# Altium PCB ControlBoard.PcbDoc
Units mm, origin at the board's own origin, x right, y up, seen from the top; angles counter-clockwise.
Board outline 70.61 x 45.09 mm, 2 copper layers (Top Layer, Bottom Layer); 70 components, 40 nets, 252 pads, 100 vias.
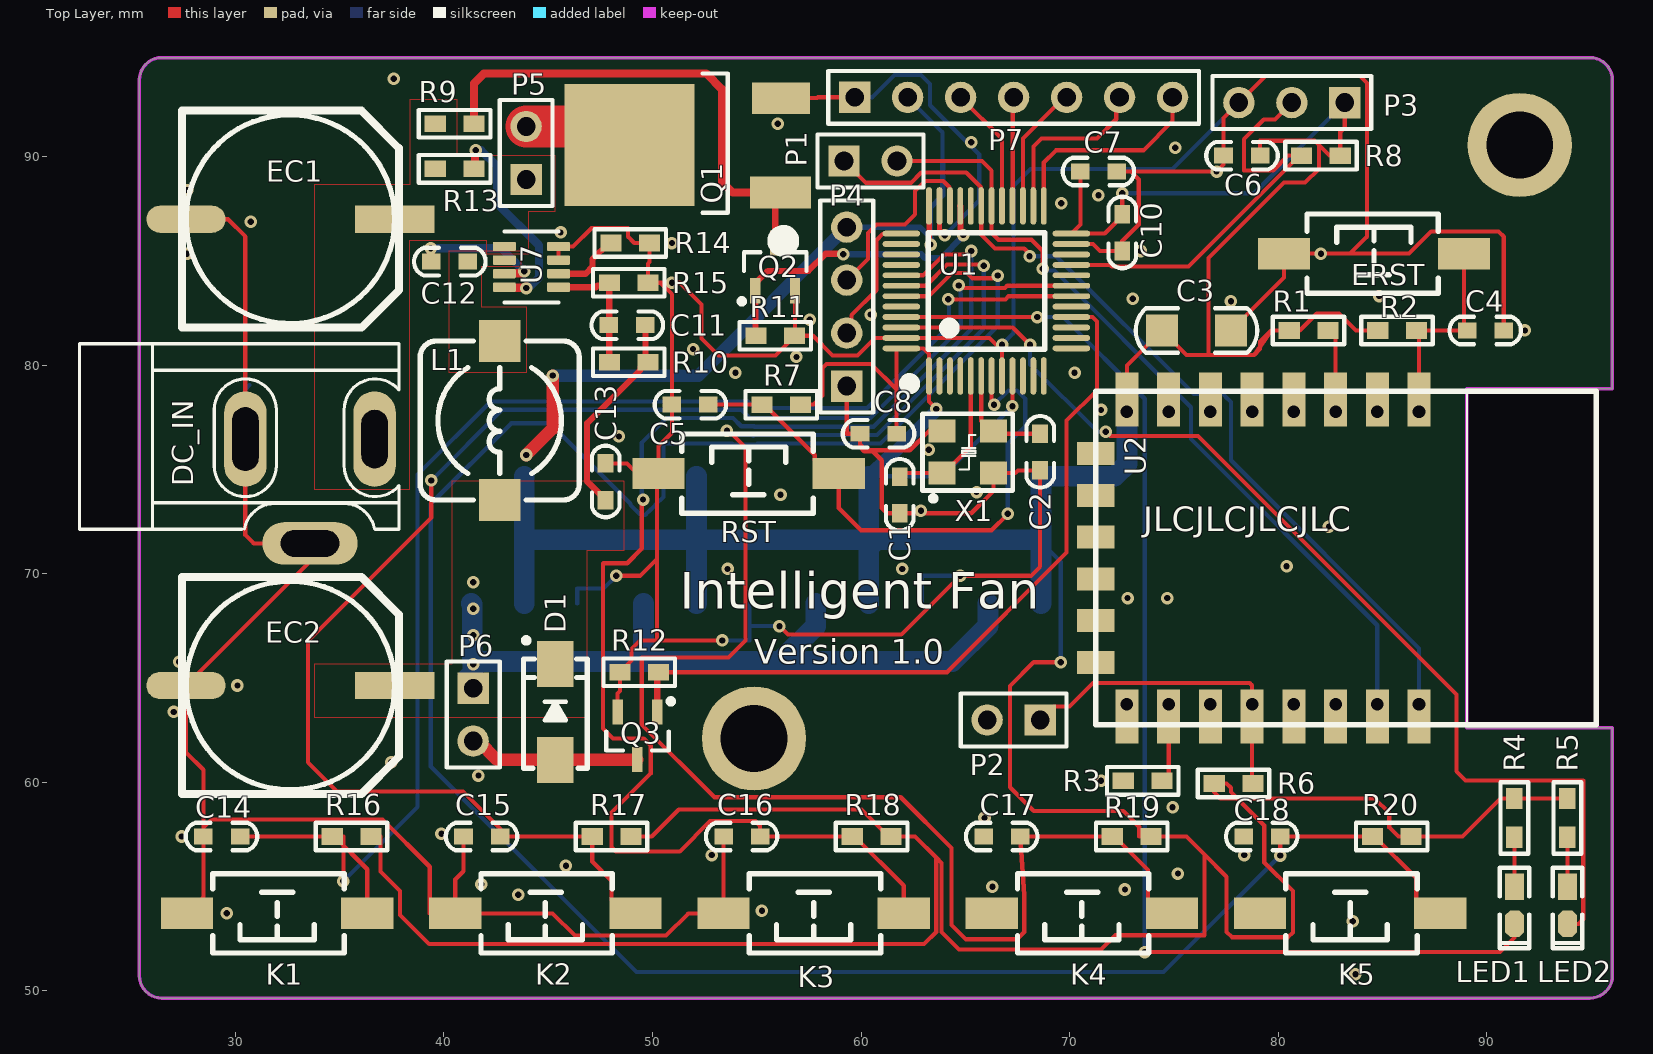
[diagram p0: Top Layer view]
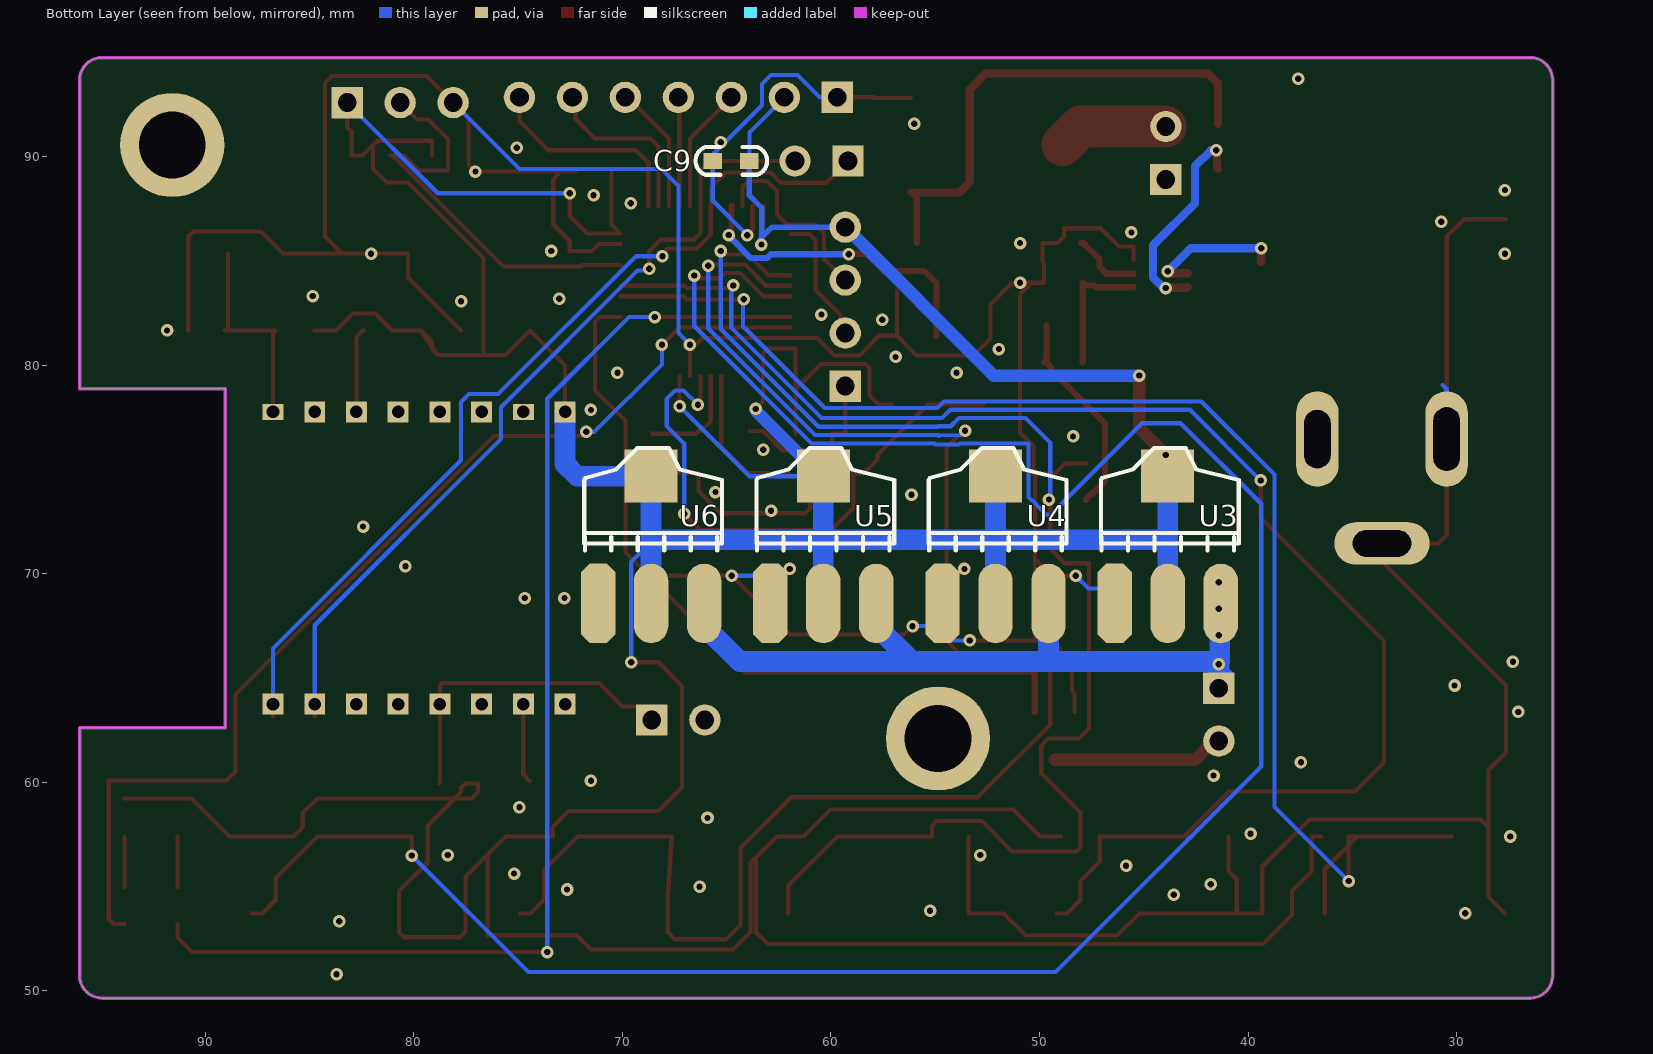
[diagram p1: Bottom Layer view, seen from below]

## Layer stack, top to bottom
Top Solder: solder mask 0.0102, Solder Resist, Dk 3.5
Top Layer: signal copper 0.0356
Dielectric 1: dielectric 0.32, FR-4, Dk 4.8
Bottom Layer: signal copper 0.0356
Bottom Solder: solder mask 0.0102, Solder Resist, Dk 3.5

## Board outline
25.4,50.732 25.4,93.667 cw(c26.475,93.667) 26.475,94.742 94.937,94.742 cw(c94.937,93.667) 96.012,93.667 96.012,78.867 89.027,78.867 89.027,62.611 96.012,62.611 96.012,50.732 cw(c94.937,50.732) 94.937,49.657 26.475,49.657 cw(c26.475,50.732)

## Design rules (kind name [scope] priority, off if disabled: settings)
AssemblyTestPointUsage [All] p0: scope1count=1 scope1_0_kind=Board scope1_0_value=Board scope2count=1 scope2_0_kind=Board scope2_0_value=Board commentlength=0
AssemblyTestpoint [All] p0: scope1count=1 scope1_0_kind=Board scope1_0_value=Board scope2count=1 scope2_0_kind=Board scope2_0_value=Board commentlength=0
Clearance [All] p0: scope1count=1 scope1_0_kind=Board scope1_0_value=Board scope2count=1 scope2_0_kind=Board scope2_0_value=Board commentlength=0 gap=0.2
Clearance [All] p1: gap=0.2 ignorepadtopadclearanceinfootprint=FALSE
ComponentClearance [All] p0: scope1count=1 scope1_0_kind=Board scope1_0_value=Board scope2count=1 scope2_0_kind=Board scope2_0_value=Board commentlength=0 gap=0.254 collisioncheckmode=3
DiffPairsRouting [All] p0: scope1count=1 scope1_0_kind=Board scope1_0_value=Board scope2count=1 scope2_0_kind=Board scope2_0_value=Board commentlength=0
FabricationTestPointUsage [All] p0: scope1count=1 scope1_0_kind=Board scope1_0_value=Board scope2count=1 scope2_0_kind=Board scope2_0_value=Board commentlength=0 valid=0 allowmultiple=FALSE
FabricationTestpoint [All] p0: scope1count=1 scope1_0_kind=Board scope1_0_value=Board scope2count=1 scope2_0_kind=Board scope2_0_value=Board commentlength=0 side=3 testpointundercomponent=TRUE minsize=1.016 maxsize=2.54 preferedsize=1.524 minholesize=0 maxholesize=1.016 preferedholesize=0.813 testpointgrid=0.025
FanoutControl Fanout_BGA [All] p0 off: scope1count=1 scope1_0_kind=Board scope1_0_value=Board scope2count=1 scope2_0_kind=Board scope2_0_value=Board commentlength=69 // Protel DXP Scope 1 Expression Was: IsBGA   Fanout_BGA (Default Rule)
FanoutControl Fanout_LCC [All] p0 off: scope1count=1 scope1_0_kind=Board scope1_0_value=Board scope2count=1 scope2_0_kind=Board scope2_0_value=Board commentlength=69 // Protel DXP Scope 1 Expression Was: IsLCC   Fanout_LCC (Default Rule)
FanoutControl Fanout_SOIC [All] p0 off: scope1count=1 scope1_0_kind=Board scope1_0_value=Board scope2count=1 scope2_0_kind=Board scope2_0_value=Board commentlength=71 // Protel DXP Scope 1 Expression Was: IsSOIC   Fanout_SOIC (Default Rule)
FanoutControl Fanout_Small [All] p0 off: scope1count=1 scope1_0_kind=Board scope1_0_value=Board scope2count=1 scope2_0_kind=Board scope2_0_value=Board commentlength=84 // Protel DXP Scope 1 Expression Was: (CompPinCount < 5)   Fanout_Small (Default Rule)
FanoutControl Fanout_Default [All] p0: scope1count=1 scope1_0_kind=Board scope1_0_value=Board scope2count=1 scope2_0_kind=Board scope2_0_value=Board commentlength=30 // Fanout_Default (Default Rule)
Height [All] p0: scope1count=1 scope1_0_kind=Board scope1_0_value=Board scope2count=1 scope2_0_kind=Board scope2_0_value=Board commentlength=0
HoleSize [All] p0: scope1count=1 scope1_0_kind=Board scope1_0_value=Board scope2count=1 scope2_0_kind=Board scope2_0_value=Board commentlength=0 absolutevalues=TRUE maxlimit=20 minlimit=0.025 maxpercent=80.000 minpercent=20.000
HoleSize [All] p1: absolutevalues=TRUE maxlimit=20 minlimit=0.025 maxpercent=80.000 minpercent=20.000
HoleToHoleClearance [All] p0: scope1count=1 scope1_0_kind=Board scope1_0_value=Board scope2count=1 scope2_0_kind=Board scope2_0_value=Board commentlength=0
LayerPairs [All] p0: scope1count=1 scope1_0_kind=Board scope1_0_value=Board scope2count=1 scope2_0_kind=Board scope2_0_value=Board commentlength=0 enforce=TRUE
MinimumSolderMaskSliver [All] p0: scope1count=1 scope1_0_kind=Board scope1_0_value=Board scope2count=1 scope2_0_kind=Board scope2_0_value=Board commentlength=0
NetAntennae [All] p0: scope1count=1 scope1_0_kind=Board scope1_0_value=Board scope2count=1 scope2_0_kind=Board scope2_0_value=Board commentlength=0
PasteMaskExpansion [All] p0: scope1count=1 scope1_0_kind=Board scope1_0_value=Board scope2count=1 scope2_0_kind=Board scope2_0_value=Board commentlength=0 expansion=0
PlaneClearance [All] p0: scope1count=1 scope1_0_kind=Board scope1_0_value=Board scope2count=1 scope2_0_kind=Board scope2_0_value=Board commentlength=0 clearance=0.508
PlaneConnect [All] p0: scope1count=1 scope1_0_kind=Board scope1_0_value=Board scope2count=1 scope2_0_kind=Board scope2_0_value=Board commentlength=0 planeconnectstyle=Direct reliefexpansion=0.508 reliefentries=4 reliefconductorwidth=0.254 reliefairgap=0.254
PlaneConnect [All] p1: planeconnectstyle=Direct reliefexpansion=0.508 reliefentries=4 reliefconductorwidth=0.254 reliefairgap=0.254
PolygonConnect [All] p0: scope1count=1 scope1_0_kind=Board scope1_0_value=Board scope2count=1 scope2_0_kind=Board scope2_0_value=Board commentlength=0 connectstyle=Direct reliefconductorwidth=0.254 reliefentries=4 polygonreliefangle="90 Angle"
PolygonConnect [All] p1: connectstyle=Direct reliefconductorwidth=0.254 reliefentries=4 polygonreliefangle="90 Angle" airgapwidth=0.254
RoutingCorners [All] p0: scope1count=1 scope1_0_kind=Board scope1_0_value=Board scope2count=1 scope2_0_kind=Board scope2_0_value=Board commentlength=0 cornerstyle=45-Degree minsetback=2.54 maxsetback=2.54
RoutingLayers [All] p0: scope1count=1 scope1_0_kind=Board scope1_0_value=Board scope2count=1 scope2_0_kind=Board scope2_0_value=Board commentlength=0 top layer=Automatic bottom layer=Automatic
RoutingPriority [All] p0: scope1count=1 scope1_0_kind=Board scope1_0_value=Board scope2count=1 scope2_0_kind=Board scope2_0_value=Board commentlength=0
RoutingTopology [All] p0: scope1count=1 scope1_0_kind=Board scope1_0_value=Board scope2count=1 scope2_0_kind=Board scope2_0_value=Board commentlength=0 topology=Shortest
RoutingVias [All] p0: scope1count=1 scope1_0_kind=Board scope1_0_value=Board scope2count=1 scope2_0_kind=Board scope2_0_value=Board commentlength=0 holewidth=0.3 width=0.6 viastyle="Through Hole" minholewidth=0.3 minwidth=0.6 maxholewidth=0.711 maxwidth=1.27
RoutingVias [All] p1: holewidth=0.3 width=0.6 viastyle="Through Hole" minholewidth=0.3 minwidth=0.6 maxholewidth=0.711 maxwidth=1.27
ShortCircuit [All] p0: scope1count=1 scope1_0_kind=Board scope1_0_value=Board scope2count=1 scope2_0_kind=Board scope2_0_value=Board commentlength=0 allowed=FALSE
SilkToBoardRegionClearance [All] p0: scope1count=1 scope1_0_kind=Board scope1_0_value=Board scope2count=1 scope2_0_kind=Board scope2_0_value=Board commentlength=0
SilkToSilkClearance [All] p0: scope1count=1 scope1_0_kind=Board scope1_0_value=Board scope2count=1 scope2_0_kind=Board scope2_0_value=Board commentlength=0
SilkToSolderMaskClearance [All] p0 off: scope1count=1 scope1_0_kind=Board scope1_0_value=Board scope2count=1 scope2_0_kind=Board scope2_0_value=Board commentlength=44 // Protel DXP Scope 1 Expression Was: IsPad
SolderMaskExpansion [All] p0: scope1count=1 scope1_0_kind=Board scope1_0_value=Board scope2count=1 scope2_0_kind=Board scope2_0_value=Board commentlength=0 expansion=0.102
SolderMaskExpansion [All] p1: expansion=0.102 istentingtop=FALSE
UnRoutedNet [All] p0: scope1count=1 scope1_0_kind=Board scope1_0_value=Board scope2count=1 scope2_0_kind=Board scope2_0_value=Board commentlength=0
UnpouredPolygon [All] p0: scope1count=1 scope1_0_kind=Board scope1_0_value=Board scope2count=1 scope2_0_kind=Board scope2_0_value=Board commentlength=0
Width [All] p0: scope1count=1 scope1_0_kind=Board scope1_0_value=Board scope2count=1 scope2_0_kind=Board scope2_0_value=Board commentlength=0 maxlimit=20 minlimit=0.2 preferedwidth=0.2
Width [All] p1: maxlimit=20 minlimit=0.2 preferedwidth=0.2
28 further rules are at their usual default settings.

## Components (designator, comment, footprint, x,y, rotation, side; value= is the part's Value field where it differs from the comment)
C1 "C" "C 0603" 61.849,73.787 r90 top
C2 "C" "C 0603" 68.58,75.844 r90 top
C3 "C" "C 1206" 76.073,81.661 r180 top
C4 "C" "C 0603" 89.916,81.661 r180 top
C5 "C" "C 0603" 51.816,78.105 r0 top
C6 "C" "C 0603" 78.257,90.043 r0 top
C7 "C" "C 0603" 71.374,89.281 r180 top
C8 "C" "C 0603" 60.833,76.708 r0 top
C9 "" "C 0603" 64.77,89.789 r180 bottom
C10 "C" "C 0603" 72.517,86.36 r90 top
C11 "C" "C 0603" 48.793,81.915 r0 top
C12 "C" "C 0603" 40.284,84.963 r0 top
C13 "C" "C 0603" 47.752,74.422 r90 top
C14 "C" "C 0603" 29.337,57.406 r180 top locked
C15 "C" "C 0603" 41.803,57.406 r180 top locked
C16 "C" "C 0603" 54.268,57.406 r180 top locked
C17 "C" "C 0603" 66.734,57.406 r180 top locked
C18 "C" "C 0603" 79.199,57.406 r180 top locked
D1 "M7" SMA 45.339,63.373 r90 top locked
DC_IN "POWER" DC10B 26.035,72.136 r0 top locked
EC1 "C-CM" "CM F(10*10.2)" 32.639,86.995 r0 top
EC2 "C-CM" "CM F(10*10.2)" 32.639,64.643 r0 top
ERST "3x6x5" "TSW SMD-3*6*4.3" 84.582,85.344 r0 top
K1 "3x6x5" "TSW SMD-3*6*4.3" 32.004,53.721 r180 top locked
K2 "3x6x5" "TSW SMD-3*6*4.3" 44.863,53.721 r180 top locked
K3 "3x6x5" "TSW SMD-3*6*4.3" 57.721,53.721 r180 top locked
K4 "3x6x5" "TSW SMD-3*6*4.3" 70.58,53.721 r180 top locked
K5 "3x6x5" "TSW SMD-3*6*4.3" 83.439,53.721 r180 top locked
L1 "2A" CDRH74 42.672,77.343 r90 top
LED1 "红色" "LED 0603B" 91.313,54.102 r270 top
LED2 "红色" "LED 0603B" 93.853,54.102 r270 top
P1 "Header 2" HDR1X2 59.182,89.789 r0 top
P2 "Header 2" HDR1X2 68.58,62.992 r180 top
P3 "Header 3" HDR1X3 83.185,92.583 r180 top
P4 "Header 4" HDR1X4 59.309,78.994 r90 top
P5 "Header 2" HDR1X2 43.942,88.9 r90 top
P6 "Header 2" HDR1X2 41.402,64.516 r270 top locked
P7 "HDR-1X7" HDR1X7 59.69,92.837 r0 top
Q1 "IRFR3607" TO252 53.095,90.551 r90 top
Q2 "SI2302" SOT23-3N 55.88,84.709 r0 top
Q3 "SI2302" SOT23-3N 49.276,62.23 r180 top locked
R1 "1K" "R 0603" 81.445,81.661 r180 top
R2 "10K" "R 0603" 85.687,81.661 r0 top
R3 "1K" "R 0603" 73.495,60.071 r0 top
R4 "1K" "R 0603" 91.313,58.293 r270 top
R5 "1K" "R 0603" 93.853,58.293 r270 top
R6 "10K" "R 0603" 77.851,59.944 r0 top
R7 "10K" "R 0603" 56.172,78.105 r180 top
R8 "10K" "R 0603" 82.042,90.043 r180 top
R9 "2.1K" "R 0603" 40.513,91.567 r0 top
R10 "100K" "R 0603" 48.857,80.137 r0 top
R11 "10K" "R 0603" 55.88,81.407 r0 top
R12 "10K" "R 0603" 49.365,65.278 r180 top locked
R13 "100K" "R 0603" 40.513,89.408 r180 top
R14 "47K" "R 0603" 48.933,85.852 r180 top
R15 "17.6K" "R 0603" 48.857,83.947 r0 top
R16 "10K" "R 0603" 35.571,57.404 r180 top locked
R17 "10K" "R 0603" 48.036,57.404 r180 top locked
R18 "10K" "R 0603" 60.502,57.404 r180 top locked
R19 "10K" "R 0603" 72.967,57.404 r180 top locked
R20 "10K" "R 0603" 85.433,57.404 r180 top locked
RST "3x6x5" "TSW SMD-3*6*4.3" 54.61,74.803 r0 top
U1 "STM32F103C8T6" "LQFP48 7X7_N" 66.004,83.555 r0 top locked
U2 "ESP12" "PCBCOMPONENT_1 - DUPLICATE" 78.991,70.754 r270 top
U3 "AMS1117-3.3" AMS1117 46.393,68.58 r180 bottom
U4 "AMS1117-3.3" AMS1117 54.648,68.58 r180 bottom
U5 "AMS1117-3.3" AMS1117 62.903,68.58 r180 bottom
U6 "AMS1117-3.3" AMS1117 71.158,68.58 r180 bottom
U7 "SY8303AIC" SOT23_8 44.196,84.709 r90 top
X1 "8M" XTAL-3225 63.957,74.879 r90 top

## Footprints (in the part's own frame and the unit in brackets; to place one, negate y for a bottom-side part, rotate by r counter-clockwise, add the part's x,y. Pads: shape width x height; smd on the part's side, far side on the other; paste and mask are expansions set on the pad)
AMS1117 [mil]
  oct 65x150 smd: 1(0.03,-0.06)
  oval 65x150 smd: 2(100.03,-0.06) 3(200.03,-0.06)
  rect 100x100 smd: 4(100.03,239.94)
  silkscreen extent -26,100 234,293
"C 0603" [mil] "无极性贴片电容"
  rect 35x30 smd: 1(-35,0) 2(34,0)
  silkscreen extent -67,-26 67,26
"C 1206" [mil] "无极性贴片电容"
  rect 60x60 smd: 1(-65,0) 2(65,0)
  silkscreen extent -115,-42 115,42
CDRH74 [mm] "7.3*7.3*4.5mm（长宽高）"
  rect 2x2 smd: 1(-3.81,0) 2(3.81,0)
  silkscreen extent -3.81,-3.81 3.81,3.81
"CM F(10*10.2)" [mm] "贴片电解电容，直径10mm，高10.2mm"
  rect 3.8x1.3 smd: 1(5,0)
  oval 3.8x1.3 smd: 2(-5,0)
  silkscreen extent -5.2,-5.2 5.2,5.2
DC10B [mil]
  oval 80x180 hole 50 slot 110 at 90 deg: 1(419.09,170)
  oval 80x180 hole 50 slot 120 at 90 deg: 2(175,170)
  oval 180x80 hole 50 slot 110 at 0 deg: 3(297.05,-26.85)
  silkscreen extent -138,0 465,350
HDR1X2 [mm] "Connector; Header; 2 Position"
  rect 1.5x1.5 hole 0.9: 1(0,0)
  round 1.5 hole 0.9: 2(2.54,0)
  silkscreen extent -1.27,-1.27 3.81,1.27
HDR1X3 [mm] "Connector; Header; 3 Position"
  rect 1.5x1.5 hole 0.9: 1(0,0)
  round 1.5 hole 0.9: 2(2.54,0) 3(5.08,0)
  silkscreen extent -1.27,-1.27 6.35,1.27
HDR1X4 [mm] "Connector; Header; 4 Position"
  rect 1.5x1.5 hole 0.9: 1(0,0)
  round 1.5 hole 0.9: 2(2.54,0) 3(5.08,0) 4(7.62,0)
  silkscreen extent -1.27,-1.27 8.89,1.27
HDR1X7 [mm] "Connector; Header; 7 Position"
  rect 1.5x1.5 hole 0.9: 1(0,0)
  round 1.5 hole 0.9: 2(2.54,0) 3(5.08,0) 4(7.62,0) 5(10.16,0) 6(12.7,0) 7(15.24,0)
  silkscreen extent -1.27,-1.27 16.51,1.27
"LED 0603B" [mil] "蓝色0603LED"
  rect 50x35 smd: 1(-35,0.26)
  oct 50x35 smd: 2(35,0.26)
  silkscreen extent -71,-28 81,28
"LQFP48 7X7_N" [mm] "48脚，体宽7x7mm，脚距0.5mm"
  oval 0.279x1.8 smd: 1(-2.75,-4.075) 2(-2.25,-4.075) 3(-1.75,-4.075) 4(-1.25,-4.075) 5(-0.75,-4.075) 6(-0.25,-4.075) 7(0.25,-4.075) 8(0.75,-4.075) 9(1.25,-4.075) 10(1.75,-4.075) 11(2.25,-4.075) 12(2.75,-4.075) 25(2.75,4.075) 26(2.25,4.075) 27(1.75,4.075) 28(1.25,4.075) 29(0.75,4.075) 30(0.25,4.075) 31(-0.25,4.075) 32(-0.75,4.075) 33(-1.25,4.075) 34(-1.75,4.075) 35(-2.25,4.075) 36(-2.75,4.075)
  oval 1.8x0.279 smd: 13(4.075,-2.75) 14(4.075,-2.25) 15(4.075,-1.75) 16(4.075,-1.25) 17(4.075,-0.75) 18(4.075,-0.25) 19(4.075,0.25) 20(4.075,0.75) 21(4.075,1.25) 22(4.075,1.75) 23(4.075,2.25) 24(4.075,2.75) 37(-4.075,2.75) 38(-4.075,2.25) 39(-4.075,1.75) 40(-4.075,1.25) 41(-4.075,0.75) 42(-4.075,0.25) 43(-4.075,-0.25) 44(-4.075,-0.75) 45(-4.075,-1.25) 46(-4.075,-1.75) 47(-4.075,-2.25) 48(-4.075,-2.75)
  silkscreen extent -3.93,-4.69 2.79,2.79
"PCBCOMPONENT_1 - DUPLICATE" [mm]
  rect 2.6x1.1 smd: 1(-7.6,7.75) 2(-7.6,5.75) 3(-7.6,3.75) 4(-7.6,1.75) 5(-7.6,-0.25) 6(-7.6,-2.25) 7(-7.6,-4.25) 8(-7.6,-6.25) 15(7.6,-6.25) 16(7.6,-4.25) 17(7.6,-2.25) 18(7.6,-0.25) 19(7.6,1.75) 20(7.6,3.75) 21(7.6,5.75) 22(7.6,7.75)
  rect 0.762x1 hole 0.6: 1(-7,7.75) 7(-7,-4.25)
  rect 0.762x1 / inner rect 0.762x1 / far side rect 1x1 hole 0.6: 2(-7,5.75) 3(-7,3.75) 4(-7,1.75) 5(-7,-0.25) 6(-7,-2.25) 8(-7,-6.25) 15(7,-6.25) 16(7,-4.25) 17(7,-2.25) 18(7,-0.25) 19(7,1.75) 20(7,3.75) 21(7,5.75) 22(7,7.75)
  rect 1.1x1.8 smd: 9(-5,-7.75) 10(-3,-7.75) 11(-1,-7.75) 12(1,-7.75) 13(3,-7.75) 14(5,-7.75)
  silkscreen extent -8,-7.75 8,16.25
"R 0603" [mil] "1/10W贴片电阻"
  rect 40x31.5 smd: 1(-36.5,0) 2(36.5,0)
  silkscreen extent -68,-26 67,26
SMA [mm] "4.5x2.6*2.2mm（长宽高，不包括引脚）"
  rect 2.2x1.75 smd: 1(-2.3,0) 2(2.3,0)
  silkscreen extent -2.7,-1.52 3.56,1.52
SOT23-3N [mm] "3x1.3x1mm(长宽高)"
  rect 0.5x1.2 smd: 1(-0.95,-1.143) 2(0.95,-1.143) 3(0,1.143)
  silkscreen extent -1.72,-1.78 1.5,0.7
SOT23_8 [mm] "SOT23_8"
  rrect25% 0.45x1.1 smd mask+0: 1(-0.975,-1.3) 2(-0.325,-1.3) 3(0.325,-1.3) 4(0.975,-1.3) 5(0.975,1.3) 6(0.325,1.3) 7(-0.325,1.3) 8(-0.975,1.3)
  silkscreen extent -1.7,-1.3 1.7,1.3
TO252 [mil] "252晶体管"
  rect 60x115 smd: 1(-89.55,-119.77)
  rect 230x245 smd: 2(0,165.35)
  rect 60x110 smd: 3(88.45,-120.77)
  silkscreen extent -196,-140 135,28
"TSW SMD-3*6*4.3" [mm] "3*6*4.3mm"
  rect 2.5x1.5 smd: 1(-4.318,0) 2(4.318,0)
  silkscreen extent -3.21,-1.9 3.09,1.9
XTAL-3225 [mm]
  rect 1.1x1.3 smd: 1(-0.051,0.076) 2(-0.051,-2.388) 3(1.956,-2.388) 4(1.956,0.076)
  silkscreen extent -1.4,-3.3 2.79,1.02

## Part data
C1 C2 C3 C4 C5 C6 C7 C8 C10 C11 C12 C13 C14 C15 C16 C17 C18: "无极性贴片电容"
C9: library part C, "无极性贴片电容"
D1: "整流二极管"
DC_IN: library part POW
EC1 EC2: "贴片电解电容"
ERST K1 K2 K3 K4 K5 RST: library part "TSW 3x6", "3x6轻触开关"
L1: library part L-CDRH, "功率屏蔽电感"
LED1 LED2: library part LED-SMD, "贴片LED"
P1 P2 P5 P6: "Header, 2-Pin"
P3: "Header, 3-Pin"
P4: "Header, 4-Pin"
P7: library part "Header 7", "7P接插件"
Q1: "Nmos"
Q2 Q3: "N沟道场效应管"
R1 R2 R3 R4 R5 R6 R7 R8 R9 R10 R11 R12 R13 R14 R15 R16 R17 R18 R19 R20: library part R
U1: library part STM32F103C8, "Flash:64/RAM:20/IO:36"
U2: library part "ESP-12E&F Module", "ESP-12E&F Module"
U3 U4 U5 U6: library part AMS1117
U7: "Buck升压芯片"
X1: library part XTAL-4, "4脚晶振"

## Free pads (board coordinates)
  round 5 hole 3.2: 1(54.864,62.103) 1(91.567,90.551)

## Via types
v1: diameter 0.6, hole 0.3, Top Layer to Bottom Layer, tented both sides, 100 vias

## Nets (pads, with @x,y where several pads share a name; then routed paths per layer and width w, separated by ;. In a path a pad name is that pad's centre, name@x,y a point inside that pad or via, vN(x,y) a via of type N, cw(c..) or ccw(c..) an arc to the next point about the centre after c; other vN are vias at no path point)
4V: C11.2 C13.1 D1.2 EC2.1 L1.1 P6.1 R10.2 U3.3 U4.3 U5.3 U6.3 | length 48.7
  Top Layer w0.3: C13.1 47.752,73.596 47.521,73.827 47.458,73.827 46.863,74.422 46.863,77.216 49.426,79.779 49.426,79.887 49.676,80.137 R10.2 49.657,80.264 C11.2
  Bottom Layer w0.2: v1@41.357,65.786 40.745,65.173 P6.1
  Bottom Layer w1: U3.3 41.357,68.534 v1@41.357,65.786 ; P6.1 41.402,65.786 49.567,65.786 ; U4.3 49.567,65.786 ; U5.3 57.822,67.499 56.109,65.786 ; U6.3 66.077,67.499 64.364,65.786 56.109,65.786 ; 49.567,65.786 56.109,65.786
  other v1: 41.402,65.659 41.402,67.056 41.402,68.326 41.402,69.596
12V: DC_IN.1 EC1.1 P5.1 R9.1 R13.2 U7.5
DATA: P3.2 R8.2 U1.21 | length 20.7
  Top Layer w0.2: U1.21 71.934,84.805 72.012,84.727 75.69,84.727 R8.2@81.007,90.043 ; P3.2 79.832,91.77 79.299,91.77 78.359,90.83 78.359,89.332 79.756,89.332 80.467,90.043 R8.2@81.007,90.043 ; R8.2 R8.2@81.007,90.043
ESP_RST: C4.2 ERST.2 R2.2 U2.1 | length 10.1
  Top Layer w0.2: U2.1@86.741,77.754 86.741,78.354 86.741,81.534 R2.2 C4.2 88.9,81.813 ERST.2
GND: C1.1 C2.1 C3.1 C4.1 C5.1 C6.1 C7.1 C8.1 C9.1 C10.1 C13.2 C14.2 C15.2 C16.2 C17.2 C18.2 DC_IN.2 DC_IN.3 EC1.2 EC2.2 ERST.1 K1.2 K2.2 K3.2 K4.2 K5.2 P2.2 P3.3 P4.1 P7.1 Q1.3 Q2.2 Q3.2 R3.1 R11.2 R12.2 R14.1 R15.2 RST.1 U1.8 U1.23 U1.35 U1.44 U1.47 U2.15 U3.1 U4.1 U5.1 U6.1 U7.3 U7.4 X1.2 X1.4 | length 283.6
  Top Layer w0.2: EC1.2 29.642,86.995 30.48,86.157 DC_IN.2 30.48,71.86 30.886,71.454 DC_IN.3 33.58,70.584 EC2.2 27.639,61.439 28.473,60.604 28.473,57.836 ; K1.2 28.473,54.508 C14.2 28.473,57.836 ; C15.2 40.939,55.741 40.545,55.347 K2.2 ; U7.3 U7.4 46.187,85.684 47.066,86.563 48.819,86.563 48.819,86.157 49.124,85.852 R14.1 49.86,84.938 49.784,84.861 R15.2 50.394,83.947 ; C13.2 48.768,75.286 49.251,74.803 RST.1@50.216,74.803 ; v1(48.26,69.901) 49.403,69.901 50.216,70.714 ; Q3.2 48.326,64.262 48.438,64.374 R12.2 48.995,65.835 48.995,66.394 49.403,66.802 50.216,66.802 ; v1(53.34,66.802) 50.216,66.802 ; C16.2 53.404,55.551 53.404,55.55 K3.2 51.714,53.721 50.648,52.654 46.279,52.654 45.212,53.721 K2.2 ; v1(56.083,67.488) 56.49,67.081 61.925,67.081 v1(64.745,69.901) 68.148,69.901 68.58,70.333 C2.1 67.513,74.955 67.386,74.828 X1.2 66.345,73.965 65.278,72.898 C1.1 61.239,72.898 60.985,73.152 60.985,75.438 60.554,75.87 60.147,75.87 59.944,76.073 59.944,76.222 ; Q1.3 57.887,92.798 57.926,92.837 P7.1 ; R11.2 R11.2@56.83,81.407 ; Q2.2 R11.2@56.83,81.407 ; P4.1 59.309,76.708 C8.1 59.944,76.222 ; X1.4 63.246,76.835 62.332,75.921 60.246,75.921 59.944,76.222 ; U1.8 v1@66.754,80.696 ; v1(66.754,80.975) v1@66.754,80.696 ; U1.23 71.12,85.805 71.454,85.471 C10.1 72.517,85.954 73.304,86.741 73.304,88.904 72.927,89.281 ; C7.1 72.927,89.281 ; C3.1 80.264,84.201 ERST.1 83.439,85.344 ; C4.1 90.805,86.157 90.551,86.411 87.325,86.411 86.258,85.344 83.439,85.344 ; 28.473,57.836 28.854,58.217 37.059,58.217 39.319,55.956 39.319,53.721 K2.2 ; 50.216,66.802 50.216,70.714 ; 50.216,70.714 RST.1@50.216,74.803 ; RST.1@50.216,74.803 RST.1 50.292,76.124 50.927,76.759 C5.1 50.927,83.414 50.394,83.947 ; 50.394,83.947 51.308,83.947 52.349,82.906 52.349,81.28 53.162,80.467 55.89,80.467 R11.2@56.83,81.407 ; R11.2@56.83,81.407 57.683,81.407 58.623,80.467 59.818,80.467 60.655,81.305 U1.47 66.145,81.305 v1@66.754,80.696 ; 72.927,89.281 v1(77.038,89.281) 77.368,89.611 C6.1 77.368,91.846 P3.3 79.375,93.853 83.922,93.853 84.252,93.523 84.252,86.157 83.439,85.344
  Top Layer w0.254: U1.35 63.754,86.487 v1(64.011,86.23)
  Bottom Layer w0.2: DC_IN.2 30.48,78.842 30.683,79.045 ; DC_IN.3 DC_IN.3@34.138,71.454 ; U3.1 46.392,69.291 47.65,69.291 v1(48.26,69.901) ; v1(53.34,66.802) 54.647,66.802 U4.1@54.647,67.488 ; U4.1 U4.1@54.647,67.488 ; v1(56.083,67.488) U4.1@54.647,67.488 ; P7.1 60.528,92.837 61.595,93.904 62.865,93.904 63.297,93.472 63.297,92.456 65.659,90.094 C9.1 65.659,87.884 64.011,86.236 v1(64.011,86.23) ; U5.1 62.902,69.901 v1(64.745,69.901) ; v1(66.754,80.975) 67.31,81.531 67.31,88.595 68.123,89.408 74.93,89.408 P3.3
  other v1: 83.693,50.8 83.566,53.34 29.591,53.721 55.245,53.848 43.561,54.61 72.644,54.864 66.294,54.991 41.783,55.118 75.184,55.626 45.847,56.007 52.832,56.515 78.359,56.515 27.432,57.404 39.878,57.531 65.913,58.293 74.93,58.801 71.501,60.071 41.656,60.325 37.465,60.96 27.051,63.373 30.099,64.643 27.305,65.786 72.771,68.834 74.676,68.834 53.594,70.231 61.976,70.231 80.391,70.358 82.423,72.263 62.865,73.025 56.134,73.787 65.532,73.914 63.246,75.946 48.387,76.581 71.501,77.851 53.975,79.629 70.231,79.629 56.896,80.391 51.943,80.772 91.821,81.661 57.531,82.169 60.452,82.423 77.724,83.058 73.025,83.185 84.836,83.312 50.927,83.947 27.686,85.344 82.042,85.344 73.406,85.471 50.927,85.852 45.593,86.36 30.734,86.868 69.596,87.757 71.374,88.138 27.686,88.392 75.057,90.424 65.278,90.678 56.007,91.567 37.592,93.726
GPIO0: P2.1 R6.2 U2.18 | length 15.7
  Top Layer w0.2: P2.1 69.23,63.642 69.992,63.642 71.12,64.77 78.624,64.77 78.741,64.653 78.741,63.754 78.741,63.154 78.741,59.981 R6.2
Heat: Q2.1 R11.1 U1.33 | length 15.1
  Top Layer w0.2: v1@64.754,86.376 64.762,86.368 v1@64.77,86.36
  Top Layer w0.3: R11.1 54.93,81.43 Q2.1 54.93,83.916 55.53,84.516 57.465,84.516 58.293,85.344 59.055,85.344 59.087,85.312 v1(59.139,85.312) ; U1.33 64.762,87.622 64.762,86.368 v1(64.897,86.233)
  Bottom Layer w0.3: v1(59.139,85.312) 62.878,85.312 63.059,85.131 63.831,85.131 64.897,86.197 v1(64.897,86.233)
KEY0: C14.1 K1.1 R16.2 U1.18 | length 68.3
  Top Layer w0.2: C14.1 34.642,57.406 R16.2 R16.2@34.752,57.404 ; v1(35.179,55.27) 35.179,57.404 R16.2@34.752,57.404 ; K1.1 36.322,55.834 R16.2@34.752,57.404 ; v1(64.17,83.153) 66.915,83.153 67.066,83.305 U1.18
  Bottom Layer w0.2: v1(35.179,55.27) 38.735,58.826 38.735,74.752 42.243,78.26 54.582,78.26 54.864,77.978 54.898,77.944 60.291,77.944 64.209,81.862 64.209,83.115 v1(64.17,83.153)
KEY1: C15.1 K2.1 R17.2 U1.19 | length 76.6
  Top Layer w0.2: v1(39.395,74.473) 39.395,72.695 33.477,66.777 33.477,60.96 34.874,59.563 40.919,59.563 43.078,57.404 R17.2 ; C15.1 42.693,57.404 R17.2 ; K2.1 48.681,53.721 48.031,54.371 48.031,55.277 47.109,56.198 R17.2 ; v1(64.678,83.82) 64.83,83.82 64.957,83.693 66.889,83.693 67,83.805 U1.19
  Bottom Layer w0.2: v1(39.395,74.473) 42.783,77.86 54.273,77.86 54.664,77.47 54.864,77.47 60.452,77.47 64.77,81.788 64.77,83.402 64.755,83.417 64.755,83.743 v1(64.678,83.82)
KEY2: C16.1 K3.1 R18.2 U1.41 | length 67
  Top Layer w0.2: v1(49.548,73.553) 49.479,73.484 49.479,71.196 48.787,70.504 47.642,70.504 47.625,70.487 47.625,62.586 48.108,62.103 49.581,62.103 49.911,61.773 49.911,60.427 48.031,58.547 48.031,56.896 48.235,56.693 51.308,56.693 52.756,58.141 54.928,58.141 55.157,57.912 C16.1 59.573,57.406 R18.2 59.683,57.404 62.039,55.047 K3.1 ; U1.41 62.969,84.305 63.973,85.309 65.116,85.309 v1(65.278,85.471)
  Bottom Layer w0.2: v1(49.548,73.553) 49.479,73.622 49.479,76.276 50.663,77.46 53.864,77.46 54.254,77.07 54.864,77.07 54.89,77.044 60.592,77.044 65.278,81.73 v1(65.278,85.471)
KEY3: C17.1 K4.1 R19.2 U1.42 | length 80.1
  Top Layer w0.2: v1(53.569,76.86) 53.645,76.86 54.458,76.048 54.458,66.802 53.645,65.989 49.479,65.989 49.479,62.778 52.973,59.284 61.9,59.284 64.338,56.845 64.338,53.162 65.024,52.476 67.462,52.476 67.818,52.832 67.818,54.592 C17.1 72.039,57.406 R19.2 72.148,57.404 73.748,55.804 73.748,54.371 74.398,53.721 K4.1 ; U1.42 63.104,83.805 64.119,84.82 65.802,84.82 65.861,84.761 v1(65.878,84.761)
  Bottom Layer w0.2: v1(53.569,76.86) 53.772,76.657 54.826,76.632 54.826,76.6 54.87,76.644 60.758,76.644 65.878,81.765 v1(65.878,84.761)
KEY4: C18.1 K5.1 R20.2 U1.43 | length 114
  Top Layer w0.2: U1.43 63.246,83.305 64.361,84.42 65.079,84.42 65.338,84.161 66.308,84.161 66.44,84.293 v1(66.548,84.293) ; v1(80.088,56.49) C18.1 84.504,57.406 R20.2 84.614,57.404 86.607,55.411 86.607,54.371 87.257,53.721 K5.1
  Bottom Layer w0.2: v1(66.548,84.293) 66.548,81.869 60.923,76.244 55.035,76.244 54.991,76.2 53.873,76.2 53.823,76.251 50.521,76.251 50.521,73.685 50.148,73.313 50.148,73.304 49.796,72.953 49.788,72.953 49.651,72.816 49.437,72.816 48.948,73.304 48.948,73.353 45.085,77.216 43.231,77.216 39.37,73.355 39.37,60.757 49.225,50.902 74.5,50.902 v1(80.088,56.49)
LCD_CS: P7.7 U1.25 | length 10.2
  Top Layer w0.2: U1.25 68.754,89.709 69.342,90.297 73.533,90.297 74.93,91.694 P7.7
LCD_DC: P7.6 U1.26 | length 8.5
  Top Layer w0.2: U1.26 68.254,90.479 68.644,90.868 71.31,90.868 72.229,91.787 72.229,92.676 P7.6
LCD_RST: P7.5 U1.27 | length 6.1
  Top Layer w0.2: U1.27 67.754,90.868 69.723,92.837 P7.5
LCD_SCL: P7.3 U1.29 | length 6
  Top Layer w0.2: P7.3 66.754,90.853 U1.29
LCD_SDA: P7.4 U1.28 | length 5.2
  Top Layer w0.2: U1.28 67.269,87.645 67.269,92.796 P7.4
NetC11_1: C11.1 R10.1 R15.1 U7.1 | length 6.3
  Top Layer w0.3: U7.1 47.285,83.734 47.371,83.82 47.803,83.82 R15.1 R10.1
NetC12_1: C12.1 U7.7 | length 6.5
  Top Layer w0.4: v1@39.37,85.471 39.37,84.988 C12.1 ; U7.7 42.921,84.409 43.769,84.409 v1(43.855,84.495)
  Bottom Layer w0.4: v1(39.37,85.598) 42.753,85.598 v1(43.855,84.495)
NetC12_2: C12.2 L1.2 U7.6
NetD1_1: D1.1 P6.2 Q3.3 | length 8.3
  Top Layer w0.3: D1.1 D1.1@45.353,61.087
  Top Layer w0.6: P6.2 41.646,61.976 42.549,61.073 D1.1 ; D1.1@45.353,61.087 Q3.3
NetLED1_1: LED1.1 R4.2 | length 2.4
  Top Layer w0.2: R4.2 91.32,57.359 LED1.1
NetLED1_2: LED1.2 U1.45 | length 58.5
  Top Layer w0.2: U1.45 v1(68.444,82.305) ; v1(73.592,51.867) 90.627,51.867 91.32,52.559 LED1.2
  Bottom Layer w0.2: v1(68.444,82.305) 69.677,82.305 73.592,78.39 v1(73.592,51.867)
NetLED2_1: LED2.1 R5.2 | length 2.4
  Top Layer w0.2: R5.2 93.86,57.359 LED2.1
NetLED2_2: LED2.2 U1.46 | length 51.9
  Top Layer w0.2: U1.46 67.268,81.805 v1(68.097,80.975) ; v1(71.73,76.81) 71.933,76.606 76.149,76.606 88.544,64.211 88.544,60.528 88.976,60.096 94.615,60.096 94.615,53.442 94.386,53.213 LED2.2
  Bottom Layer w0.2: v1(68.097,80.975) 68.097,80.035 71.323,76.81 v1(71.73,76.81)
NetP5_2: P5.2 Q1.2 | length 5.3
  Top Layer w2: P5.2 48.006,91.44 Q1.2
NetQ1_1: Q1.1 Q2.3 R9.2 | length 24.3
  Top Layer w0.3: Q2.3 55.88,88.019 Q1.1
  Top Layer w0.4: R9.2 41.44,93.51 41.91,93.98 52.578,93.98 53.34,93.218 53.34,88.773 53.837,88.276 Q1.1
NetR1_1: R1.1 U2.3 | length 4.1
  Top Layer w0.2: R1.1 82.441,81.661 82.741,81.361 82.741,78.354 U2.3@82.741,77.754
NetR3_2: R3.2 U2.16 | length 3.8
  Top Layer w0.2: R3.2 74.441,60.071 74.741,60.371 74.741,63.154 U2.16@74.741,63.754
NetR13_1: R13.1 U7.8 | length 10.2
  Top Layer w0.4: R13.1 41.491,89.459 41.491,90.259 v1(41.529,90.297) ; U7.8 42.921,83.709 43.799,83.709 v1@43.815,83.693
  Bottom Layer w0.4: v1(41.529,90.297) 41.783,90.297 42.545,89.535 42.545,87.757 44.556,85.746 44.556,84.206 44.043,83.693 v1(43.942,83.693)
NetR14_2: R14.2 U7.2 | length 3.3
  Top Layer w0.3: U7.2 46.792,84.384 47.117,84.709 47.117,85.071 47.898,85.852 R14.2
NRST: C5.2 R7.2 RST.2 U1.7 | length 27.5
  Top Layer w0.2: C5.2 R7.2 55.353,78.105 57.778,75.68 57.778,75.453 58.428,74.803 RST.2 58.928,73.152 59.995,72.085 66.243,72.085 v1(67.031,72.873) ; U1.7 66.254,78.221 v1(66.37,78.105)
  Bottom Layer w0.2: v1(66.37,78.105) 67.056,78.791 67.462,78.791 67.869,78.384 67.869,77.089 67.031,76.251 v1(67.031,72.873)
PWM1: Q3.1 R12.1 U1.16 | length 36.8
  Top Layer w0.2: R12.1 64.11,65.278 69.85,71.018 69.85,77.343 71.298,78.791 71.298,82.093 71.086,82.305 U1.16
  Top Layer w0.3: Q3.1 50.226,65.212 R12.1
SWDCLK: P4.2 U1.37 | length 6.4
  Top Layer w0.2: P4.2 59.534,81.759 59.534,82.394 60.729,83.589 60.729,85.987 61.031,86.289 61.913,86.289 U1.37
SWDIO: P4.3 U1.34 | length 9.3
  Top Layer w0.2: P4.3 60.325,85.09 60.325,86.326 60.743,86.744 62.103,86.744 62.587,87.229 62.587,88.346 63.072,88.83 63.936,88.83 64.239,88.527 64.239,87.645 U1.34
USART1_RX: P1.1 U1.31 U2.22 | length 43.9
  Top Layer w0.2: P1.1 60.232,88.739 62.389,88.739 62.88,89.23 65.036,89.23 65.739,88.527 65.739,87.645 U1.31 65.754,86.265 66.421,85.598 67.818,85.598 68.072,85.344 v1(68.072,85.217) ; U2.22@86.741,63.154 U2.22@86.741,63.754
  Bottom Layer w0.2: v1(68.072,85.217) 69.342,85.217 75.946,78.613 77.353,78.613 77.47,78.496 77.47,78.486 77.724,78.232 77.724,75.438 86.741,66.421 U2.22@86.741,63.754
USART1_TX: P1.2 U1.30 U2.21 | length 39.8
  Top Layer w0.2: P1.2 65.786,89.789 66.254,89.321 U1.30 66.254,86.331 66.577,86.008 68.17,86.008 68.707,85.471 v1(68.707,84.616) ; U2.21@84.741,63.154 U2.21@84.741,63.754
  Bottom Layer w0.2: v1(68.707,84.616) 68.784,84.54 69.261,84.54 75.819,77.981 75.819,76.454 84.741,67.532 U2.21@84.741,63.754
VCC: C3.2 C6.2 C7.2 C8.2 C9.2 C10.2 P3.1 P4.4 P7.2 R1.2 R2.1 R4.1 R5.1 R6.1 R7.1 R8.1 R16.1 R17.1 R18.1 R19.1 R20.1 U1.1 U1.9 U1.24 U1.36 U1.48 U2.8 U3.2 U3.4 U4.2 U4.4 U5.2 U5.4 U6.2 U6.4 | length 322.3
  Top Layer w0.2: R16.1 36.957,57.404 36.957,55.728 37.897,54.788 37.897,53.645 39.294,52.248 63.017,52.248 63.602,52.832 63.602,56.388 ; R17.1 49.962,57.404 51.257,58.699 60.02,58.699 61.316,57.404 R18.1 62.586,57.404 63.602,56.388 ; R7.1 57.709,78.105 58.141,78.537 58.141,79.858 58.344,80.061 60.477,80.061 61.697,78.842 ; C8.2 61.697,78.842 ; v1(63.602,77.902) 63.254,78.249 U1.1 63.254,80.543 62.992,80.805 U1.48 61.697,80.805 61.697,78.842 ; v1(67.254,78.029) U1.9 ; v1(69.571,65.761) 68.275,65.761 67.132,64.618 67.132,59.766 68.275,58.623 72.568,58.623 73.33,57.861 73.33,57.404 R19.1 75.59,57.404 76.454,56.54 ; C7.2 70.51,86.736 U1.24 71.679,86.305 72.517,87.143 C10.2 v1(72.517,88.24) ; U2.8@72.741,77.754 72.741,78.354 72.741,79.98 C3.2 75.59,80.493 76.657,80.493 ; C6.2 79.121,90.754 81.737,90.754 81.94,90.551 ; P3.1 83.185,91.402 82.969,91.186 R8.1 82.448,90.043 81.94,90.551 ; R2.1 83.718,81.661 82.906,82.474 81.839,82.474 81.026,81.661 R1.2 79.654,81.661 ; R5.1 R4.1 90.64,59.22 88.824,57.404 R20.1 85.75,57.404 85.319,57.836 85.319,58.522 84.607,59.233 78.029,59.233 ; 63.602,56.388 63.852,56.138 63.852,52.832 64.694,51.99 71.506,51.99 72.187,52.671 76.454,52.671 76.454,56.54 ; 76.454,56.54 77.521,55.474 77.521,52.832 77.775,52.578 80.467,52.578 80.696,52.807 80.696,54.788 79.324,56.159 79.324,57.937 78.029,59.233 ; 76.657,80.493 78.842,80.493 ; 76.657,80.493 76.657,85.128 80.277,88.748 81.28,88.748 81.94,89.408 81.94,90.551 ; 78.029,59.233 77.216,59.233 76.911,59.538 76.911,59.944 R6.1 77.521,59.944 77.724,59.741 77.724,59.538 78.029,59.233 ; 78.842,80.493 79.121,80.894 ; 78.842,80.493 79.121,80.772 79.121,80.894 ; 79.121,80.894 79.654,81.661 ; 79.121,80.894 79.121,81.128 79.654,81.661
  Top Layer w0.254: U1.36 63.259,87.625 63.259,85.851 v1(63.329,85.781)
  Top Layer w0.6: v1(43.942,75.692) 45.212,76.962 v1(45.212,79.502)
  Bottom Layer w0.2: U5.2 60.362,70.714 61.277,71.628 68.504,71.628 69.571,70.561 v1(69.571,65.761) ; U5.4 63.9,74.674 v1(67.254,78.029) ; P7.2 63.906,91.161 C9.2 ; v1(72.517,88.24) 78.842,88.24 P3.1
  Bottom Layer w0.254: P4.4 62.812,86.614 63.311,86.115 ; v1(63.329,85.781) 63.329,86.009 63.373,86.053 63.311,86.115 ; C9.2 63.906,88.134 63.311,87.538 63.311,86.115
  Bottom Layer w0.6: v1@45.339,79.502 52.197,79.502 P4.4 ; U5.4 61.332,75.644 61.42,75.644 63.602,77.826 v1(63.602,77.902)
  Bottom Layer w1: U3.2 43.852,71.626 ; U3.4 43.852,71.626 ; U4.2 52.107,71.626 ; U4.4 52.107,71.626 ; U5.2 60.362,70.714 60.362,71.626 ; U5.4 60.362,71.626 ; U6.2 68.617,71.501 ; U2.8@72.741,77.754 72.741,75.26 72.155,74.674 U6.4 68.617,71.501 ; 43.852,71.626 52.107,71.626 ; 52.107,71.626 60.362,71.626 ; 60.362,71.626 61.277,71.626 68.492,71.626 68.617,71.501
XTALI: C1.2 U1.5 X1.1 | length 7.4
  Top Layer w0.2: C1.2 62.027,74.828 X1.1 63.981,74.828 65.254,76.101 U1.5
XTALO: C2.2 U1.6 X1.3 | length 5.2
  Top Layer w0.2: U1.6 65.754,77.326 66.245,76.835 X1.3 66.472,76.708 C2.2
pads on no net: U1.2 U1.3 U1.4 U1.10 U1.11 U1.12 U1.13 U1.14 U1.15 U1.17 U1.20 U1.22 U1.32 U1.38 U1.39 U1.40 U2.2 U2.4 U2.5 U2.6 U2.7 U2.9 U2.10 U2.11 U2.12 U2.13 U2.14 U2.17 U2.19 U2.20

## Polygon pours and split planes (outlines as drawn)
GND on Top Layer "GND_L01_P003" (solid, pour order 3): 25.4,50.732 25.4,93.667 cw(c26.475,93.667) 26.475,94.742 94.937,94.742 cw(c94.937,93.667) 96.012,93.667 96.012,78.867 89.027,78.867 89.027,62.611 96.012,62.611 96.012,50.732 cw(c94.937,50.732) 94.937,49.657 26.475,49.657 cw(c26.475,50.732)
NetC12_2 on Top Layer "NETC12_2_L01_P001" (solid, pour order 1): 40.259,85.471 43.688,85.471 43.688,84.709 41.783,84.709 41.783,82.804 43.942,82.804 43.942,79.629 40.259,79.629
12V on Top Layer "12V_L01_P000" (solid, pour order 0): 33.782,74.041 38.354,74.041 38.354,85.979 42.037,85.979 42.037,85.344 44.069,85.344 44.069,87.376 45.339,87.376 45.339,90.043 40.64,90.043 40.64,92.71 38.354,92.71 38.354,88.646 33.782,88.646
4V on Top Layer "4V_L01_P002" (solid, pour order 2): 33.782,63.119 46.863,63.119 46.863,71.12 48.641,71.12 48.641,74.422 40.386,74.422 40.386,65.659 33.782,65.659
no net on Top Solder "NONET_L-01_P-001" (solid): 43.053,72.644 43.053,66.802 45.212,66.802 45.212,63.881 39.243,63.881 39.243,65.278 41.275,65.278 41.275,72.644
no net on Top Solder "NONET_L-01_P-001" (solid): 36.068,77.851 36.068,86.36 37.338,86.36 37.465,86.233 37.465,77.851
no net on Top Solder "NONET_L-01_P-001" (solid): 42.291,85.471 42.291,86.233 39.497,86.233 39.497,87.63 38.989,87.63 38.989,89.027 40.132,89.027 40.132,87.757 43.434,87.757 43.434,85.471
no net on Top Solder "NONET_L-01_P-001" (solid): 43.434,84.836 41.656,84.836 41.656,80.01 40.513,80.01 40.513,85.09 43.434,85.09
GND on Bottom Layer "GND_L02_P004" (solid, pour order 4): 25.4,50.732 25.4,93.667 cw(c26.475,93.667) 26.475,94.742 94.937,94.742 cw(c94.937,93.667) 96.012,93.667 96.012,78.867 89.027,78.867 89.027,62.611 96.012,62.611 96.012,50.732 cw(c94.937,50.732) 94.937,49.657 26.475,49.657 cw(c26.475,50.732)

## Keep-outs
Keep-Out Layer:
  the board outline again, w0.16

## Silkscreen, mask and mechanical layers (free items; w line width, h text height)
Top Overlay:
  text "JLCJLCJLCJLC" at 73.533,71.652 h2
  text "Intelligent Fan" at 51.308,67.749 h3
  text "Version 1.0" at 54.866,65.3 h2

## Text inside footprints (layer, text, board x,y; h text height)
U7: Mechanical 1 "C" at 68.189,89.556 h1